# Altium PCB Carte_GR_2017_propulsion_v1.PcbDoc
Units mil, origin at the board's own origin, x right, y up, seen from the top; angles counter-clockwise.
Board outline 2400 x 3900 mil, 4 copper layers (Component Side, Inner Layer 1, Inner Layer 2, Solder Side), stack 33.234 mil thick; 74 components, 63 nets, 304 pads, 69 vias.
Unrouted connection lines stored in the file: 8.
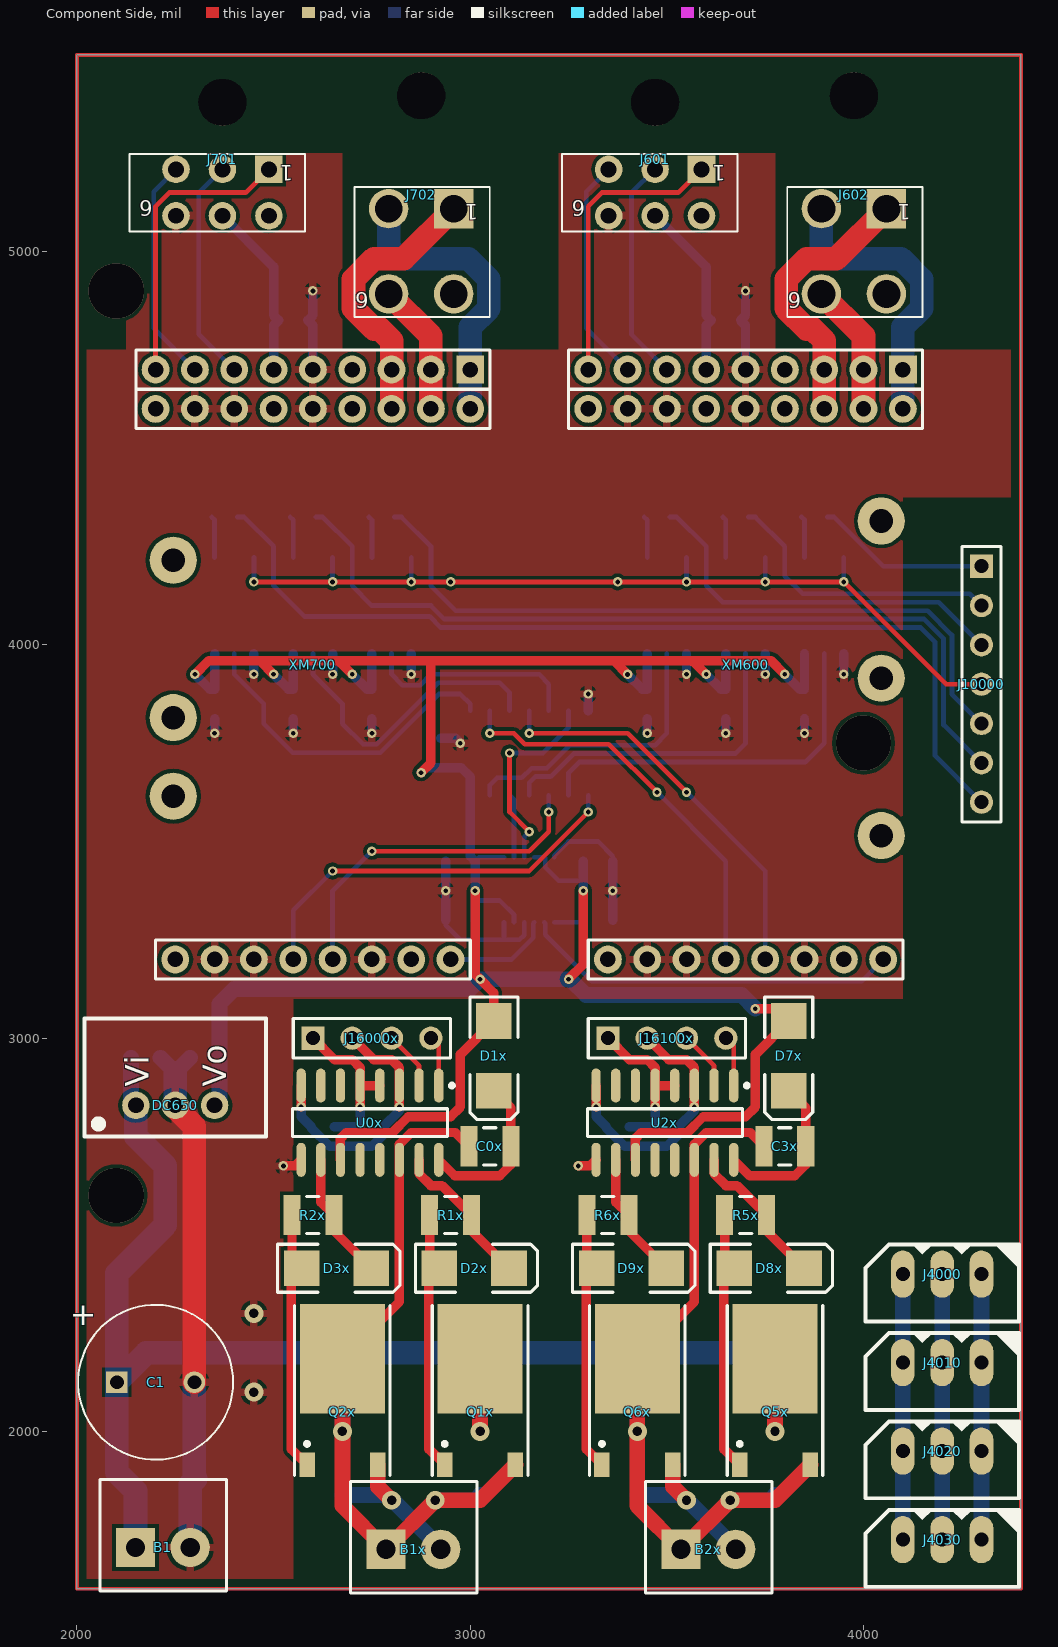
[diagram p0: Component Side view]
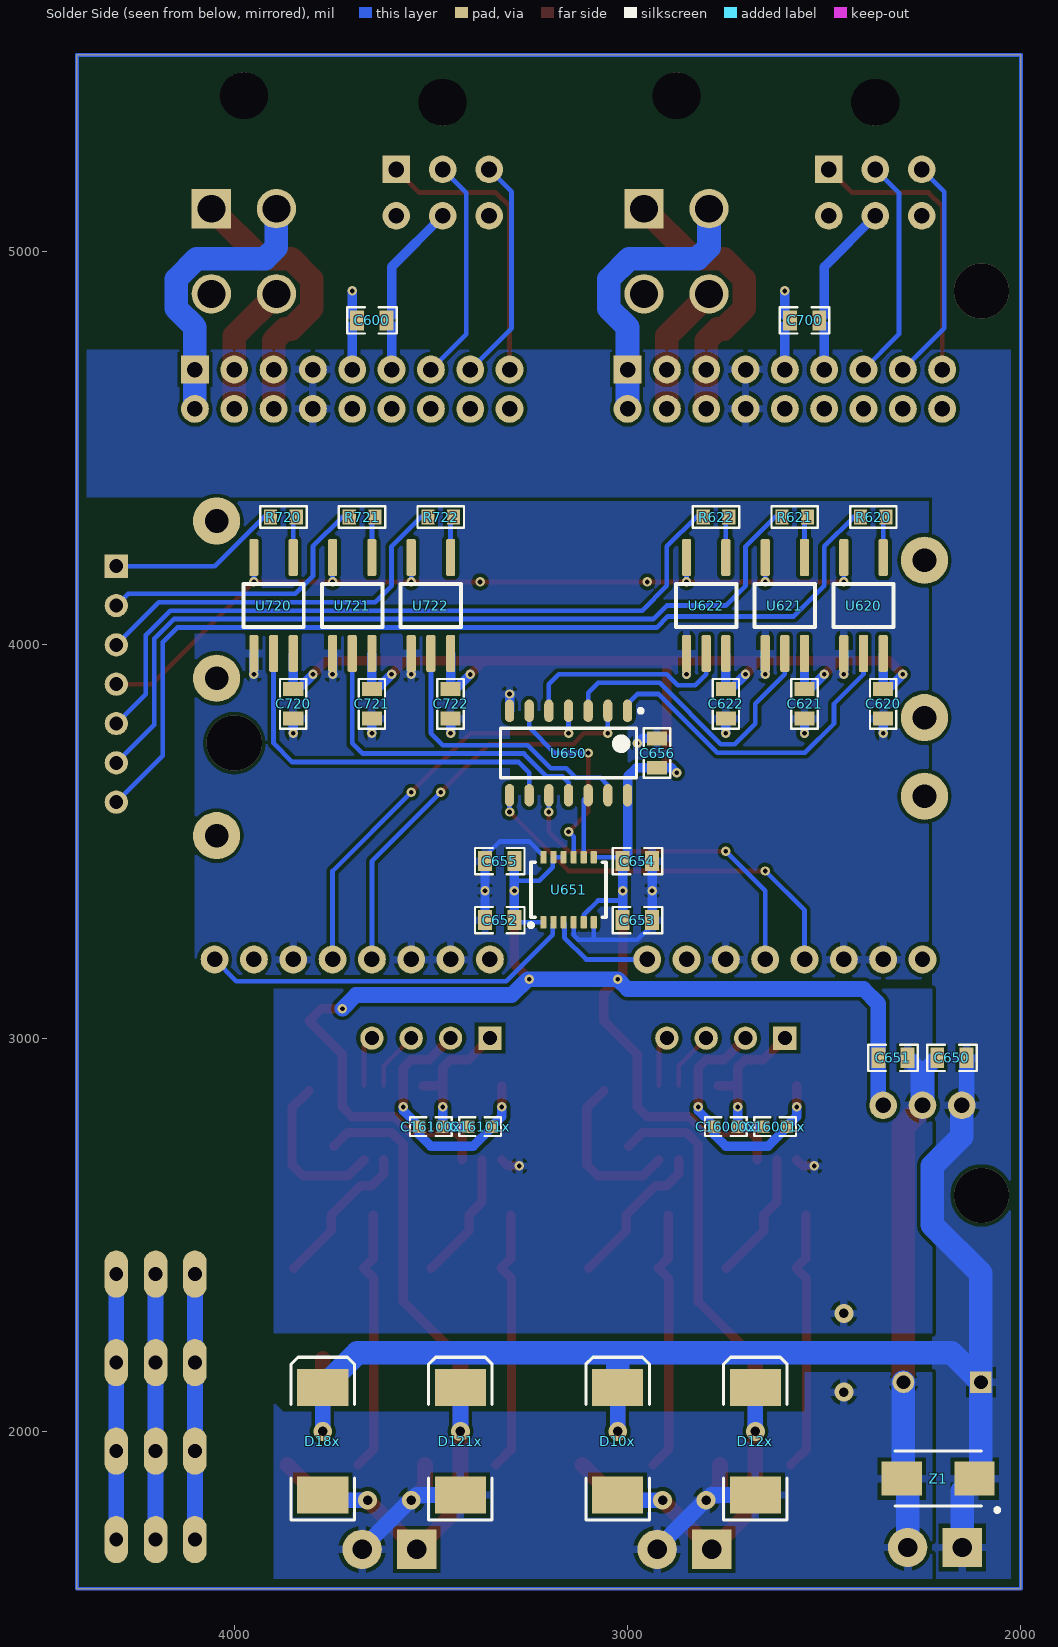
[diagram p1: Solder Side view, seen from below]
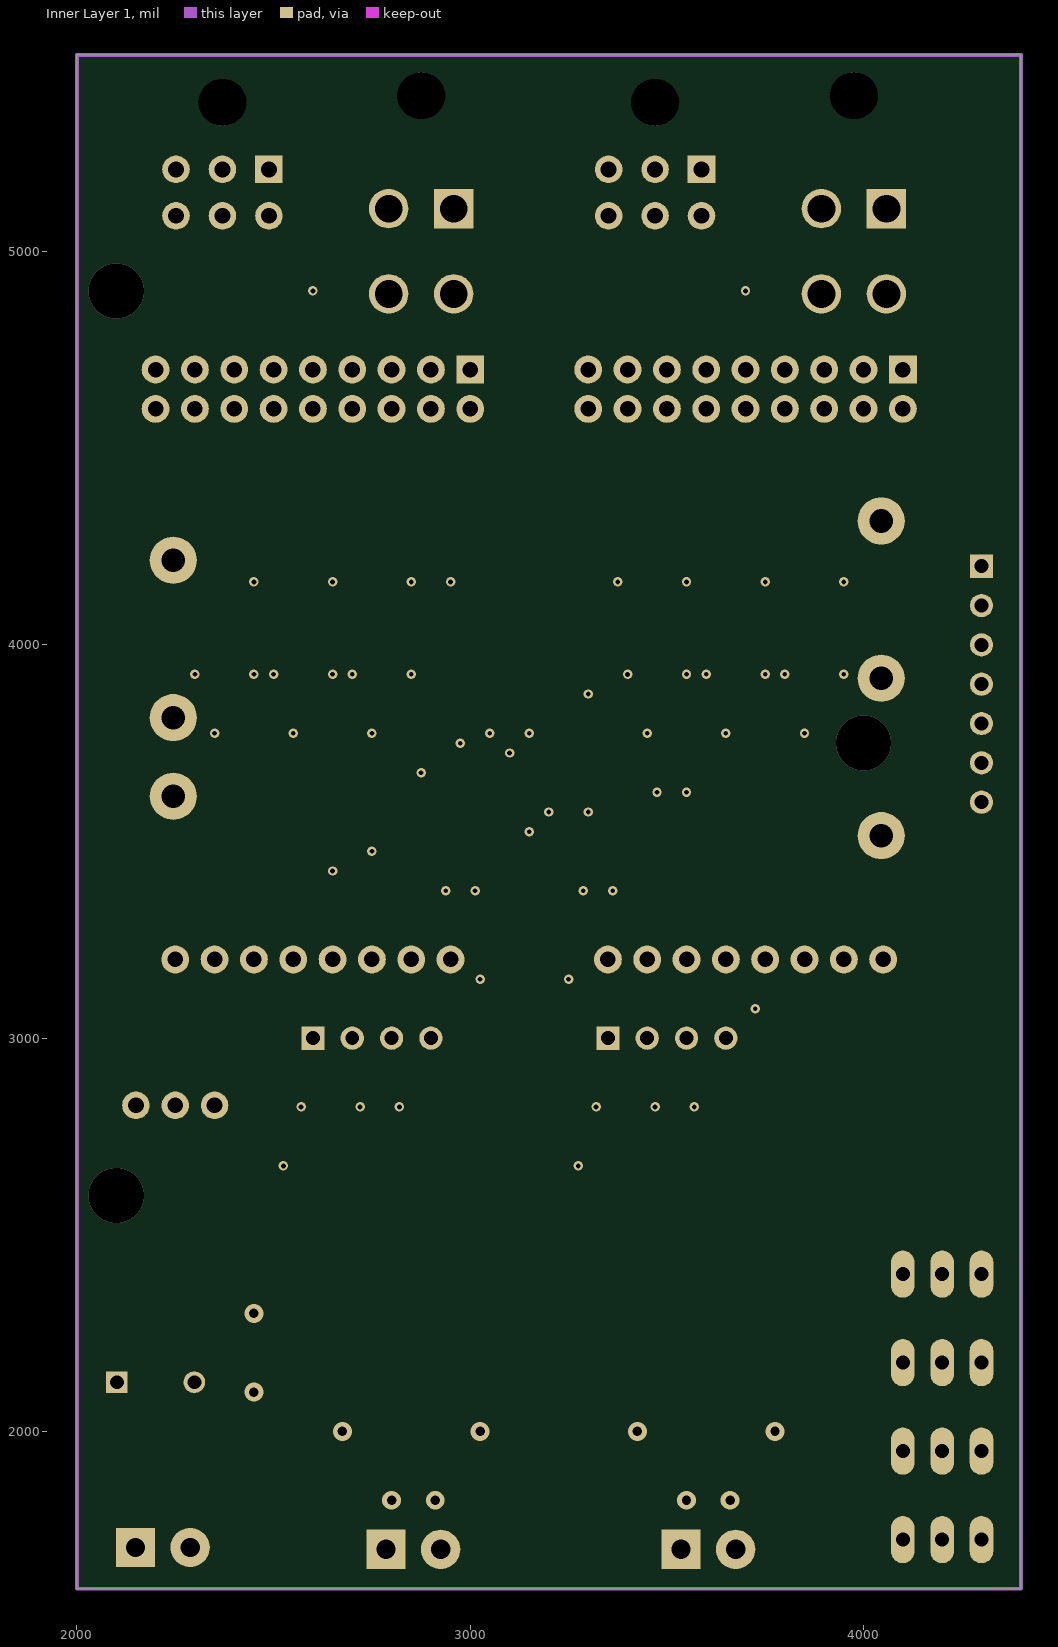
[diagram p2: Inner Layer 1]
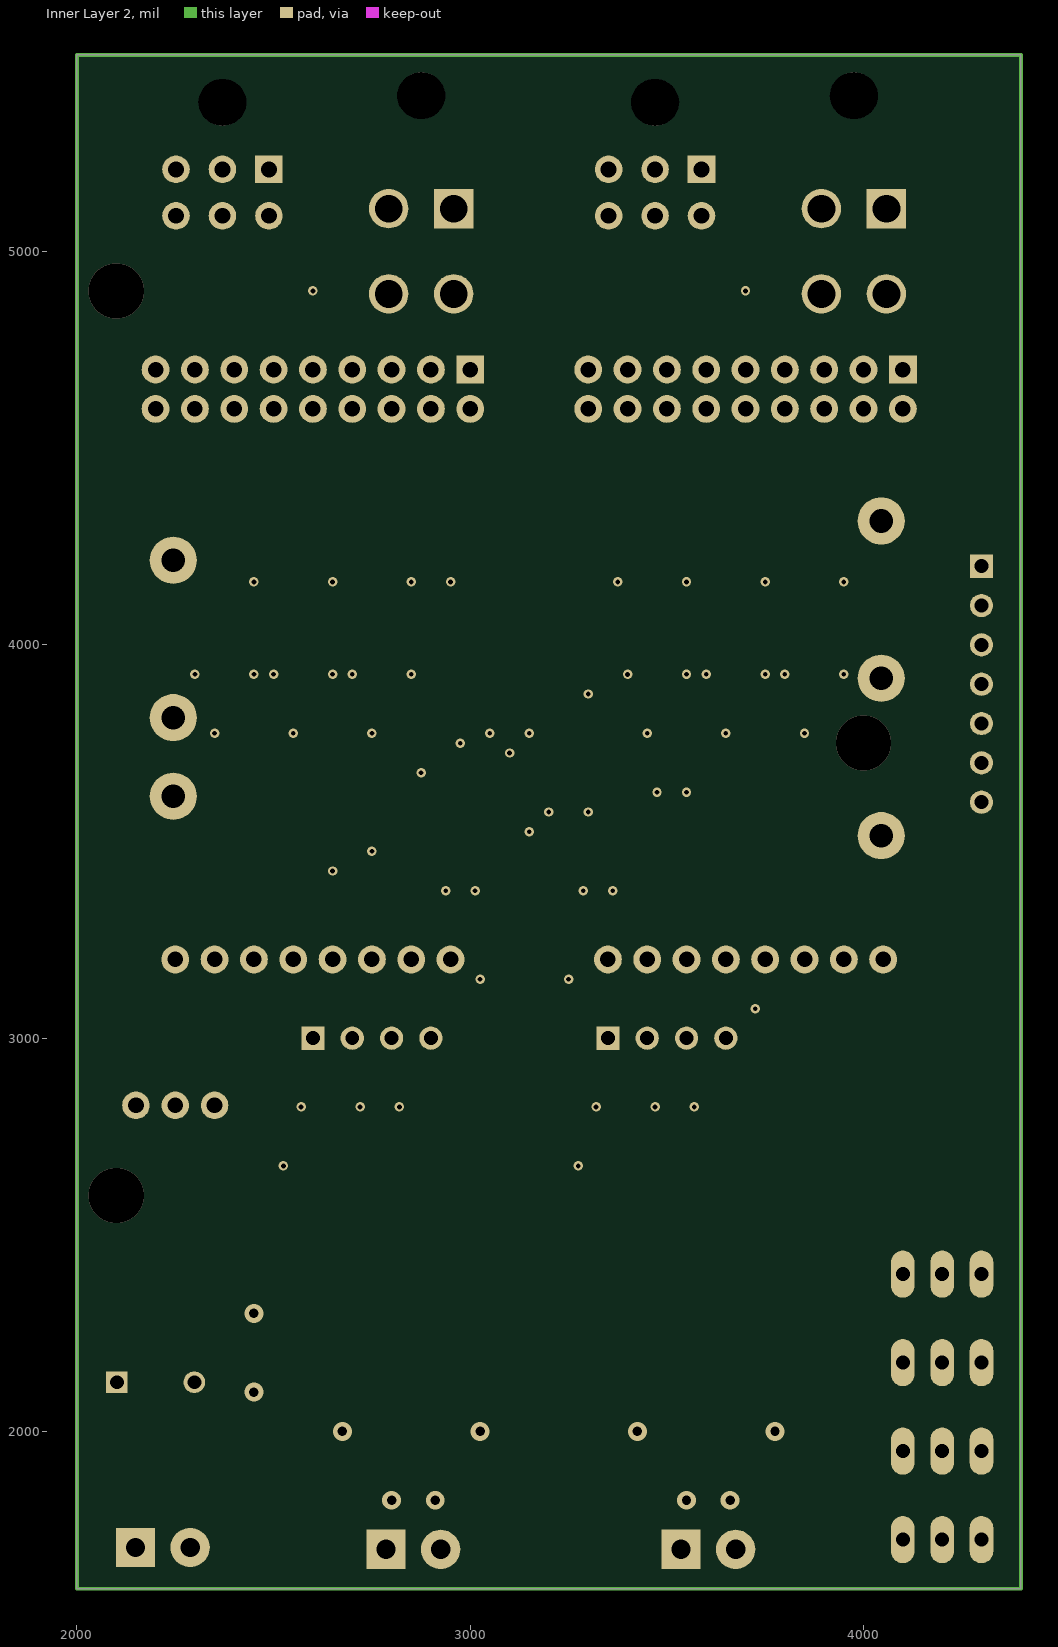
[diagram p3: Inner Layer 2]
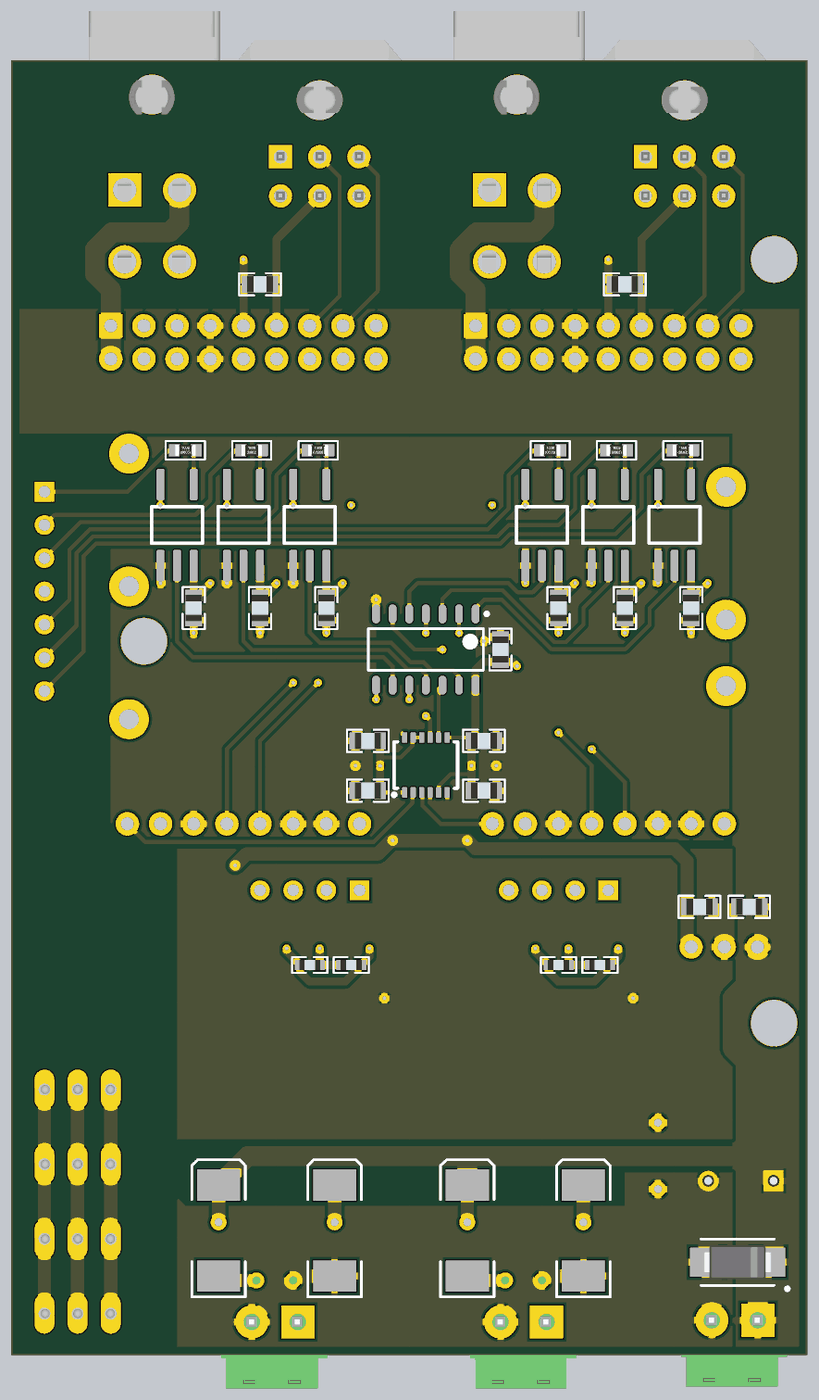
[diagram p4: 3D render of the assembled board from below, using the file's embedded part models]

## Layer stack, top to bottom
Top Solder: solder mask 0.4, Solder Resist, Dk 3.5
Component Side: signal copper 1.4
Dielectric 1: core 12.6, FR-4, Dk 4.8
Inner Layer 1: signal copper 1.417
Dielectric 6: prepreg 5, Dk 4.2
Inner Layer 2: signal copper 1.417
Dielectric 5: core 10, Dk 4.2
Solder Side: signal copper 1.4
Bottom Solder: solder mask 0.4, Solder Resist, Dk 3.5

## Board outline
2000,1600 4400,1600 4400,5500 2000,5500

## Design rules (kind name [scope] priority, off if disabled: settings)
Clearance [All] p1: gap=9.5
ComponentClearance [All] p1 off: gap=0 collisioncheckmode=3 verticalgap=10 showdistances=FALSE
PolygonConnect [All] p1: connectstyle=Relief reliefconductorwidth=20 reliefentries=4 polygonreliefangle="90 Angle" airgapwidth=10
RoutingVias [All] p1: holewidth=12 width=24 viastyle="Through Hole" minholewidth=2 minwidth=5 maxholewidth=500 maxwidth=500
SolderMaskExpansion [All] p1: expansion=4
Width [All] p1: maxlimit=400 minlimit=10 preferedwidth=20 minimp=50.000000 maximp=50.000000 favimp=50.000000
29 further rules are at their usual default settings.

## Components (designator, comment, footprint, x,y, rotation, side; value= is the part's Value field where it differs from the comment)
B1 "1776275-2" BORNIER_2V_3.5MM 2150,1705 r0 top
B1x "1776275-2" BORNIER_2V_3.5MM 2787,1700 r0 top
B2x "1776275-2" BORNIER_2V_3.5MM 3537,1700 r0 top
C0x "Cap Semi" C1210 3050,2725 r180 top
C1 "330 uF" WCAP-ATG8_10x12.5x5x0.6 2200,2125 r180 top
C3x "Cap Semi" C1210 3800,2725 r180 top
C600 "1uF" "WCAP-CSGP_0805, 2x1.25x1.25" 3650,4825 r180 bottom
C620 "1uF" "WCAP-CSGP_0805, 2x1.25x1.25" 2350,3850 r90 bottom
C621 "1uF" "WCAP-CSGP_0805, 2x1.25x1.25" 2550,3850 r90 bottom
C622 "1uF" "WCAP-CSGP_0805, 2x1.25x1.25" 2750,3850 r90 bottom
C650 "1uF" "WCAP-CSGP_0805, 2x1.25x1.25" 2175,2950 r180 bottom
C651 "1uF" "WCAP-CSGP_0805, 2x1.25x1.25" 2325,2950 r0 bottom
C652 "1uF" "WCAP-CSGP_0805, 2x1.25x1.25" 3325,3300 r180 bottom
C653 "1uF" "WCAP-CSGP_0805, 2x1.25x1.25" 2975,3300 r0 bottom
C654 "1uF" "WCAP-CSGP_0805, 2x1.25x1.25" 2975,3450 r0 bottom
C655 "1uF" "WCAP-CSGP_0805, 2x1.25x1.25" 3325,3450 r180 bottom
C656 "1uF" "WCAP-CSGP_0805, 2x1.25x1.25" 2925,3725 r270 bottom
C700 "1uF" "WCAP-CSGP_0805, 2x1.25x1.25" 2550,4825 r180 bottom
C720 "1uF" "WCAP-CSGP_0805, 2x1.25x1.25" 3850,3850 r90 bottom
C721 "1uF" "WCAP-CSGP_0805, 2x1.25x1.25" 3650,3850 r90 bottom
C722 "1uF" "WCAP-CSGP_0805, 2x1.25x1.25" 3450,3850 r90 bottom
C16000x "1µF" "WCAP-CSGP_0603, 1.6x0.8x0.8" 2750,2775 r180 bottom
C16001x "1µF" "WCAP-CSGP_0603, 1.6x0.8x0.8" 2625,2775 r0 bottom
C16100x "1µF" "WCAP-CSGP_0603, 1.6x0.8x0.8" 3500,2775 r0 bottom
C16101x "1µF" "WCAP-CSGP_0603, 1.6x0.8x0.8" 3375,2775 r0 bottom
D1x "D Schottky" SMB 3060,2955 r270 top
D2x "D Schottky" SMB 3010,2415 r0 top
D3x "D Schottky" SMB 2660,2415 r0 top
D7x "D Schottky" SMB 3810,2955 r270 top
D8x "D Schottky" SMB 3760,2415 r0 top
D9x "D Schottky" SMB 3410,2415 r0 top
D10x "Diode" SMC 3025,1975 r90 bottom
D12x "Diode" SMC 2675,1975 r90 bottom
D18x "Diode" SMC 3775,1975 r90 bottom
D121x "Diode" SMC 3425,1975 r90 bottom
DC650 "Traco 5V 1A" TSR1 2250,2900 r180 top
J601 "43045-0600" 43045-0600 3470,5150 r180 top
J602 "39-30-0040" 39-30-0040 3940,5050 r180 top
J701 "43045-0600" 43045-0600 2370,5150 r180 top
J702 "39-30-0040" 39-30-0040 2840,5050 r180 top
J4000 "22-03-5035" 20-03-5035 4200,2375 r0 top
J4010 "22-03-5035" 20-03-5035 4200,2150 r0 top
J4020 "22-03-5035" 20-03-5035 4200,1925 r0 top
J4030 "22-03-5035" 20-03-5035 4200,1700 r0 top
J10000 "" HDR1X7 4300,4200 r270 top
J16000x "MC34645" HDR1X4 2600,3000 r0 top
J16100x "MC34645" HDR1X4 3350,3000 r0 top
Q1x "IRLR8503" TO-252AA 3025,2050 r0 top
Q2x "IRLR8503" TO-252AA 2675,2050 r0 top
Q5x "IRLR8503" TO-252AA 3775,2050 r0 top
Q6x "IRLR8503" TO-252AA 3425,2050 r0 top
R1x "Res3" 14-1210 2950,2550 r180 top
R2x "Res3" 14-1210 2600,2550 r180 top
R5x "Res3" 14-1210 3700,2550 r180 top
R6x "Res3" 14-1210 3350,2550 r180 top
R620 "RC0603FR-0710KL" RESC1608X06N 2375,4325 r180 bottom
R621 "RC0603FR-0710KL" RESC1608X06N 2575,4325 r180 bottom
R622 "RC0603FR-0710KL" RESC1608X06N 2775,4325 r180 bottom
R720 "RC0603FR-0710KL" RESC1608X06N 3875,4325 r180 bottom
R721 "RC0603FR-0710KL" RESC1608X06N 3675,4325 r180 bottom
R722 "RC0603FR-0710KL" RESC1608X06N 3475,4325 r180 bottom
U0x "ADUM3223ARZ" SOIC16_N 2745,2785 r270 top
U2x "ADUM3223ARZ" SOIC16_N 3495,2785 r270 top
U620 "ACPL-M72T" ACPL-M72T 2400,4100 r270 bottom
U621 "ACPL-M72T" ACPL-M72T 2600,4100 r270 bottom
U622 "ACPL-M72T" ACPL-M72T 2800,4100 r270 bottom
U650 "CD74HC14M" SOIC127P600X175-14N 3150,3725 r270 bottom
U651 "LTC2644" MSOP-12_LTC2644 3150,3375 r90 bottom
U720 "ACPL-M72T" ACPL-M72T 3900,4100 r270 bottom
U721 "ACPL-M72T" ACPL-M72T 3700,4100 r270 bottom
U722 "ACPL-M72T" ACPL-M72T 3500,4100 r270 bottom
XM600 "380200" 380200_goldo 3300,3200 r0 top
XM700 "380200" 380200_goldo 2200,3200 r0 top
Z1 "SMBJ54A" "SMA Diode (DO-214AA)" 2210,1880 r0 bottom

## Footprints (in the part's own frame and the unit in brackets; to place one, negate y for a bottom-side part, rotate by r counter-clockwise, add the part's x,y. Pads: shape width x height; smd on the part's side, far side on the other; paste and mask are expansions set on the pad)
14-1210 [mm] "Chip Resistor, Body 3.2x2.5mm, IPC High Density"
  rect 1.1x2.6 smd: 1(-1.35,0) 2(1.35,0)
  silkscreen extent -0.4,-1.2 0.4,1.2, body extent -1.68,-1.32 1.68,1.32, height 0.9
20-03-5035 [mil]
  oval 60x120 hole 35.43: 1(100,25) 2(0,25) 3(-100,25)
  silkscreen extent -195,-95 195,100, body extent -195,-96 194,97, height 234
39-30-0040 [mm] "4 pins, straight"
  round 3 hole 3 slot 3.1 at 0 deg: 0(-0.9,-8.8)
  rect 2.54x2.54 hole 1.8: 1(-3,-1.5)
  round 2.54 hole 1.8: 2(-3,4) 3(1.2,-1.5) 4(1.2,4)
  silkscreen extent -5.33,-2.9 3.4,5.5, body extent -5.72,-15.19 4.28,4.74, height 11.4
43045-0600 [mm] "6 pins, straight"
  round 3 hole 3 slot 3.1 at 0 deg: 0(0,-5.825)
  rect 1.778x1.778 hole 1.02: 1(-3,-1.5)
  round 1.778 hole 1.02: 2(-3,1.5) 3(0,-1.5) 4(0,1.5) 5(3,-1.5) 6(3,1.5)
  silkscreen extent -5.33,-2.5 6,2.5, body extent -6.57,-10.45 6.58,1.79, height 9.83
380200_goldo [mm] "MAXON"
  rect 1.8x1.8 hole 1: 1(20.32,38.1)
  round 1.8 hole 1: 2(20.32,35.56) 3(17.78,38.1) 4(17.78,35.56) 5(15.24,38.1) 6(15.24,35.56) 7(12.7,38.1) 8(12.7,35.56) 9(10.16,38.1) 10(10.16,35.56) 11(7.62,38.1) 12(7.62,35.56) 13(5.08,38.1) 14(5.08,35.56) 15(2.54,38.1) 16(2.54,35.56) 17(0,38.1) 18(0,35.56) 19(1.27,0) 20(3.81,0) 21(6.35,0) 22(8.89,0) 23(11.43,0) 24(13.97,0) 25(16.51,0) 26(19.05,0)
  silkscreen extent -1.27,-1.27 21.59,39.37, body extent -1.27,-1.27 21.59,39.37
ACPL-M72T [mm]
  rrect40% 2.4x0.6 smd: 1(-3.1,1.27) 3(-3.1,-1.27) 4(3.1,-1.27) 5(3.1,0) 6(3.1,1.27)
  silkscreen extent -1.4,-1.95 1.4,1.95, body extent -2.3,-1.95 2.3,1.95, height 2.4
BORNIER_2V_3.5MM [mm]
  rect 2.54x2.54 hole 1.25: 1(-0.025,0)
  round 2.54 hole 1.25: 2(3.5,0)
  silkscreen extent -2.31,-2.82 5.84,4.39, body extent -2.27,-5.08 5.83,5.32, height 21.81
C1210 [mm] "Chip Capacitor, Body 3.2x2.5mm, IPC High Density"
  rect 1.1x2.6 smd: 1(-1.35,0) 2(1.35,0)
  silkscreen extent -0.4,-1.2 0.4,1.2, body extent -1.7,-1.35 1.7,1.35, height 1.3
HDR1X4 [mm]
  rect 1.5x1.5 hole 0.9: 1(0,0)
  round 1.5 hole 0.9: 2(2.54,0) 3(5.08,0) 4(7.62,0)
  silkscreen extent -1.27,-1.27 8.89,1.27
HDR1X7 [mm]
  rect 1.5x1.5 hole 0.9: 1(0,0)
  round 1.5 hole 0.9: 2(2.54,0) 3(5.08,0) 4(7.62,0) 5(10.16,0) 6(12.7,0) 7(15.24,0)
  silkscreen extent -1.27,-1.27 16.51,1.27
MSOP-12_LTC2644 [mm]
  rrect30% 0.8x0.4 smd: 1(-2.041,1.622) 2(-2.041,0.972) 3(-2.041,0.322) 4(-2.041,-0.328) 5(-2.041,-0.978) 6(-2.041,-1.628) 7(2.159,-1.628) 8(2.159,-0.978) 9(2.159,-0.328) 10(2.159,0.322) 11(2.159,0.972)
  rrect20% 0.8x0.4 smd: 12(2.159,1.622)
  silkscreen extent -2.35,-2.43 1.84,2.55, body extent -1.5,-2 1.5,2, height 1.1
RESC1608X06N [mm] "Chip Resistor, 2-Leads, Body 1,6x0,8mm, IPC Medium Density"
  rect 0.85x0.95 smd: 1(-0.825,0) 2(0.825,0)
  silkscreen extent -1.5,-0.7 1.5,0.7, body extent -0.77,-0.43 0.77,0.43, height 0.8
"SMA Diode (DO-214AA)" [mm] "Case DO-214AA"
  rect 2.6x2.2 smd: 1(2.35,0) 2(-2.35,0)
  silkscreen extent -3.93,-1.78 2.79,2.16, body extent -2.8,-1.46 2.79,1.46, height 2.41
SMB [mm] "DO-214-AA/SMB; 2 C-Bend Leads; Body 5.3 x 3.6 mm, inc. leads (LxW)"
  rect 2.3x2.3 smd: 1(-2.25,0) 2(2.25,0)
  silkscreen extent -3.8,-1.55 4.1,1.55
SMC [mm] "DO-214-AB/SMC; 2 C-Bend Leads; Body 7.9 x 5.9 mm, inc. leads (LxW)"
  rect 2.4x3.3 smd: 1(-3.475,0) 2(3.475,0)
  silkscreen extent -5.07,-2.05 5.43,2.05
SOIC16_N [mm] "SOIC, 16-Leads, Body 9.9x3.9mm, Pitch 1.27mm, IPC Medium Density"
  oval 2.2x0.6 smd: 1(-2.4,4.445) 2(-2.4,3.175) 3(-2.4,1.905) 4(-2.4,0.635) 5(-2.4,-0.635) 6(-2.4,-1.905) 7(-2.4,-3.175) 8(-2.4,-4.445) 9(2.4,-4.445) 10(2.4,-3.175) 11(2.4,-1.905) 12(2.4,-0.635) 13(2.4,0.635) 14(2.4,1.905) 15(2.4,3.175) 16(2.4,4.445)
  silkscreen extent -2.52,-5 0.9,5.42, body extent -2,-5 2,5, height 1.91
SOIC127P600X175-14N [mm] "SOIC, 14-Leads, Body 8,65x3,90mm, Pitch 1,27mm, IPC Medium Density"
  oval 1.45x0.6 smd: 1(-2.725,3.81) 2(-2.725,2.54) 3(-2.725,1.27) 4(-2.725,0) 5(-2.725,-1.27) 6(-2.725,-2.54) 7(-2.725,-3.81) 8(2.725,-3.81) 9(2.725,-2.54) 10(2.725,-1.27) 11(2.725,0) 12(2.725,1.27) 13(2.725,2.54) 14(2.725,3.81)
  silkscreen extent -2.85,-4.4 1.6,4.78, body extent -2,-4.4 2,4.4, height 1.75
TO-252AA [mm] "D-PAK/TO-252-AA; 3 Leads (1 Cropped); Body 10.4 (inc. leads) x 6.7 mm (LxW max)"
  rect 1x1.6 smd: 1(-2.285,-3.425) 3(2.285,-3.425)
  rect 5.5x7.1 smd: 4(0,3.425)
  silkscreen extent -3.08,-4.13 3.08,6.88
TSR1 [mil]
  round 70 hole 40: 1(100,70.87) 2(0,70.87) 3(-100,70.87)
  silkscreen extent -230,-150 230,150, body extent -230,-150 230,150, height 402
WCAP-ATG8_10x12.5x5x0.6 [mm] "Polarized capacitors, Aluminum Electrolytic Capacitors, 2-Leads, Body 10x12.5x5x0.6"
  rect 1.4x1.4 hole 0.9: 1(2.5,0)
  round 1.4 hole 0.9: 2(-2.5,0)
  silkscreen extent -5,-5 5,5, body extent -4.99,-5 4.96,4.97, height 12.61
"WCAP-CSGP_0603, 1.6x0.8x0.8" [mm] "WCAP-CSGP Ceramic Capacitors, size 0603, body 1.6x0.8x0.8"
  rect 0.8x0.8 smd: 1(-0.75,0) 2(0.75,0)
  silkscreen extent -1.35,-0.6 1.35,0.6, body extent -0.8,-0.4 0.8,0.4, height 0.8
"WCAP-CSGP_0805, 2x1.25x1.25" [mm] "WCAP-CSGP Ceramic Capacitors, size 0805, body 2x1.25x1.25"
  rect 0.9x1.3 smd: 1(-0.95,0) 2(0.95,0)
  silkscreen extent -1.6,-0.85 1.6,0.85, body extent -1,-0.62 1,0.63, height 1.22

## Part data
B1 B1x B2x: "TERM BLOCK 2POS SIDE ENT 3.5MM"
C0x C3x: "Capacitor (Semiconductor SIM Model)"
C1: library part "WCAP-ATG8, 860010575012", "CAP Alu 330 UF 20% 35 V"
C600 C620 C621 C622 C650 C651 C652 C653 C654 C655 C656 C700 C720 C721 C722: library part "WCAP-CSGP, 885012207103", "CAP CER 1uF 50V X7R 0805"
C16000x C16001x C16100x C16101x: library part "WCAP-CSGP, 885012206095", "CAP CER 100nF 50V X7R 0603"
D1x D2x D3x D7x D8x D9x: "Schottky Diode"
D10x D12x D18x D121x: "Default Diode"
DC650: library part TSR1-24120, "Traco 12.0V 12W 1A"
J601 J701: "CONN HEADER 6POS 3MM RT ANG TIN"
J602 J702: "MOLEX  39-30-0040 4.2 mm, 4 Contact(s)"
J4000 J4010 J4020 J4030: library part 20-03-5035
J10000: library part HDR1X7, "CONN HEADER 7POS 100MILS"
J16000x J16100x: "MULTICOMP - MC34645 - EMB. MALE COUDEE  CON. MALE 2.54MM 4VOIE"
Q1x Q2x Q5x Q6x: "HEXFET Power MOSFET"
R1x R2x R5x R6x: "Resistor"
R620 R621 R622 R720 R721 R722: "RES SMD 10K OHM 1% 1/10W 0603"
U620 U621 U622 U720 U721 U722: "Optocoupleur"
U650: "IC HEX INV SCHMITT TRIG 14-SOIC"
XM600 XM700: "DEC Module 50/5, amplificateur EC 1 Q 50 V / 5 A, régulation de vitesse, module OEM"
Z1: "DIODE TVS (Transil unidirectionelle)"

## Free pads (board coordinates)
  round 120 hole 60: 3(4045,4315) 4(4045,3915) 5(4045,3515) 6(2245,3615) 7(2245,3815) 8(2245,4215)

## Via types
v1: diameter 24, hole 12, Component Side to Solder Side, 56 vias
v2: diameter 48, hole 24, Component Side to Solder Side, 10 vias
v3: diameter 140, hole 140, Component Side to Solder Side, 3 vias

## Nets (pads, with @x,y where several pads share a name; then routed paths per layer and width w, separated by ;. In a path a pad name is that pad's centre, name@x,y a point inside that pad or via, vN(x,y) a via of type N, cw(c..) or ccw(c..) an arc to the next point about the centre after c; other vN are vias at no path point)
5V_OPTO: C620.2 C621.2 C622.2 C651.2 C652.2 C653.2 C654.2 C655.2 C656.2 C720.2 C721.2 C722.2 D1x.1 D7x.1 DC650.3 U0x.11 U2x.11 U620.6 U621.6 U622.6 U650.14 U651.1 U651.5 U651.7 U651.10 U651.11 U720.6 U721.6 U722.6 | length 7730.6
  Component Side w24: v1(2300,3925) 2335,3960 2465,3960 ; v1(2500,3925) 2465,3960 ; U0x.11 2670,2745 2685,2760 2802.62,2760 2842.62,2800 2950,2800 2975,2825 2975,2958.58 D1x.1 3060,3115 v1(3025,3150) 3012.4,3162.6 v1(3012.4,3375) ; 2670,3955 v1(2700,3925) ; v1(2875,3675) 2900,3700 2900,3960 ; v1(3250,3150) 3287.6,3187.6 v1(3287.6,3375) ; v1(3400,3924.8) 3364.8,3960 ; U2x.11 3420,2745 3435,2760 3552.62,2760 3592.62,2800 3700,2800 3725,2825 3725,2958.58 D7x.1 3778.58,3075 v1(3725,3075) ; 3561.5,3958.5 3566.5,3958.5 v1(3600,3925) ; v1(3799.8,3925) 3764.8,3960 3364.8,3960 ; 2465,3960 2900,3960 ; 2900,3960 3364.8,3960
  Solder Side w12: 3012.4,3350 3075,3350 3111.5,3313.5 U651.5 ; C654.2 3022.4,3460 U651.7 ; U651.10 U651.11 3190.48,3457.78 3190.48,3434.52 3225,3400 3287.6,3400 ; U651.1 3282.24,3294.65 C652.2
  Solder Side w24: v1(2300,3925) 2337.6,3887.4 C620.2 U620.6 ; v1(2500,3925) 2537.6,3887.4 C621.2 U621.6 ; v1(2700,3925) 2737.6,3887.4 C622.2 U622.6 ; v1(2875,3675) 2887.6,3687.6 C656.2 2977.4,3687.6 3000,3665 U650.14 3000,3462.4 C654.2 v1(3012.4,3375) 3012.4,3350 C653.2 ; C652.2 v1(3287.6,3375) 3287.6,3400 C655.2 ; v1(3400,3924.8) 3437.4,3887.4 C722.2 U722.6 ; v1(3600,3925) 3600,3924.8 3637.4,3887.4 C721.2 U721.6 ; v1(3799.8,3925) 3837.4,3887.4 C720.2 U720.6
  Solder Side w40: DC650.3 2362.4,2841.54 C651.2 2362.4,3087.4 2400,3125 3000,3125 v1(3025,3150) v1(3250,3150) 3253.68,3150 3294.18,3109.5 3690.5,3109.5 v1(3725,3075)
5V_SERVO: C16000x.1 C16001x.1 C16100x.2 C16101x.1 J16000x.2 J16100x.2 U0x.3 U0x.8 U2x.3 U2x.8 | length 1344
  Component Side w24: v1(2570,2825) U0x.8 ; J16000x.2 2755,2945 2800,2945 2820,2925 U0x.3 v1(2820,2825) ; v1(3320,2825) U2x.8 ; J16100x.2 3505,2945 3550,2945 3570,2925 U2x.3 v1(3570,2825)
  Solder Side w24: v1(2570,2825) 2570,2800.47 C16001x.1 2595.47,2772.15 2642.63,2725 2750,2725 2779.53,2754.53 C16000x.1 2820,2815.47 v1(2820,2825) ; v1(3320,2825) 3320,2800.47 C16101x.1 3345.47,2772.15 3392.63,2725 3500,2725 3529.53,2754.53 C16100x.2 3570,2815.47 v1(3570,2825)
24V: B1.1 C1.1 C650.2 D10x.2 D18x.2 DC650.1 Q1x.4 Q5x.4 XM600.7 XM600.8 XM700.7 XM700.8 Z1.2 | length 3776.6
  Component Side w40: v2(3025,2000) Q1x.4 ; v2(3775,2000) Q5x.4
  Solder Side w40: C650.2 2137.6,2841.54 DC650.1 ; 3020,2200 3025,2195 ; v2(3025,2000) D10x.2 ; v2(3775,2000) D18x.2
  Solder Side w60: B1.1 2149,1848.48 Z1.2 2101.57,1895.91 C1.1 ; DC650.1 2150,2750 2225,2675 2225,2525 2101.57,2401.57 C1.1 ; D10x.2 3025,2195 ; D18x.2 3686.81,2200 3020,2200 2176.57,2200 C1.1
DYNA_D0: J4000.1 J4010.1 J4020.1 J4030.1 | length 675
  Solder Side w40: J4030.1 J4020.1 J4010.1 J4000.1
GND: C16000x.2 C16001x.2 C16100x.1 C16101x.2 J4000.3 J4010.3 J4020.3 J4030.3 J10000.4 J16000x.1 J16100x.1 U0x.4 U0x.5 U2x.4 U2x.5 U620.3 U621.3 U622.3 U720.3 U721.3 U722.3 | length 54239.4
  Component Side w10: 2000,1600 2000,5500 4400,5500 4400,1600 2000,1600
  Component Side w12: v1(2450,4160) v1(2650,4160) v1(2850,4160) v1(2950,4160) v1(3375,4160) v1(3550,4160) v1(3750,4160) v1(3950,4160) 4210,3900 J10000.4
  Component Side w24: J16000x.1 2655,2945 2700,2945 2720,2925 U0x.5 ; v1(2720,2825) U0x.5 ; U0x.4 U0x.5 ; J16100x.1 3405,2945 3450,2945 3470,2925 U2x.5 ; v1(3470,2825) U2x.5 ; U2x.4 U2x.5
  Inner Layer 1 w10: 2000,1600 4400,1600 4400,5500 2000,5500 2000,1600
  Inner Layer 2 w10: 2000,1600 4400,1600 4400,5500 2000,5500 2000,1600
  Solder Side w10: 2000,1600 4400,1600 4400,5500 2000,5500 2000,1600
  Solder Side w12: v1(2450,4160) U620.3 ; v1(2650,4160) U621.3 ; v1(2850,4160) U622.3 ; v1(3550,4160) U722.3 ; v1(3750,4160) U721.3 ; v1(3950,4160) U720.3
  Solder Side w24: C16001x.2 C16000x.2 2720,2775.47 v1(2720,2825) ; C16101x.2 C16100x.1 3470,2775.47 v1(3470,2825)
  Solder Side w40: J4030.3 J4020.3 J4010.3 J4000.3
GND_PWR: B1.2 B1x.2 B2x.2 C1.2 C600.1 C620.1 C621.1 C622.1 C650.1 C651.1 C652.1 C653.1 C654.1 C655.1 C656.1 C700.1 C720.1 C721.1 C722.1 D12x.1 D121x.1 DC650.2 J601.6 J701.6 Q2x.3 Q6x.3 U0x.9 U2x.9 U620.4 U621.4 U622.4 U650.7 U651.4 U651.6 U651.12 U720.4 U721.4 U722.4 XM600.9 XM600.10 XM600.14 XM600.16 XM600.20 XM600.21 XM600.24 XM700.9 XM700.10 XM700.14 XM700.16 XM700.20 XM700.21 XM700.24 Z1.1 | length 4139.4
  Component Side w24: v1(2525,2675) 2554.49,2675 U0x.9 ; v1(3275,2675) 3304.49,2675 U2x.9
  Component Side w40: Q2x.3 2764.96,1860.04 v2(2800,1825) ; B1x.2 B1x.2@2924.8,1700.2 ; Q6x.3 3514.96,1860.04 v2(3550,1825) ; B2x.2 B2x.2@3674.8,1700.2
  Component Side w60: DC650.2 2250,2823.78 2298.43,2775.35 C1.2
  Solder Side w12: C653.1 2937.6,3287.4 2975,3250 3085,3250 ; U651.6 3085.91,3250.91 3085,3250 ; U651.4 3137.09,3262.09 3125,3250 3085,3250 ; U651.12 3213.86,3463.86 3250,3500 3325,3500 3362.4,3462.6 C655.1
  Solder Side w24: v1(2350,3775) C620.1 ; v1(2450,3925) U620.4 ; v1(2550,3775) C621.1 ; XM700.9 2600,4812.4 C700.1 2600,4837.6 v1(2600,4900) ; v1(2650,3925) U621.4 ; v1(2750,3775) C622.1 ; v1(2850,3925) U622.4 ; C656.1 2962.6,3762.4 v1(2975,3750) ; C653.1 C654.1 ; U650.7 v1(3300,3875) ; C652.1 C655.1 ; v1(3450,3775) C722.1 ; v1(3550,3925) U722.4 ; v1(3650,3775) C721.1 ; XM600.9 3700,4812.4 C600.1 3700,4837.6 v1(3700,4900) ; v1(3750,3925) U721.4 ; v1(3850,3775) C720.1 ; v1(3950,3925) U720.4
  Solder Side w40: C650.1 2250,2912.4 C651.1 ; D12x.1 2786.81,1838.19 v2(2800,1825) 2802.72,1825 2924.8,1702.92 B1x.2 ; D121x.1 3536.81,1838.19 v2(3550,1825) 3552.72,1825 3674.8,1702.92 B2x.2
  Solder Side w60: DC650.2 2250,2912.4 ; B1.2 2287.8,1865.28 Z1.1 2298.43,1884.09 C1.2
  other v1: 2937.6,3375 3362.4,3375
  other v2: 2450,2100 2450,2300
L1: B2x.1 C3x.2 D18x.1 D121x.2 Q5x.3 Q6x.4 U2x.14 | length 1989.2
  Component Side w24: Q6x.4 3570,2329.84 U2x.14 3570,2730 3600,2760 3711.85,2760 C3x.2
  Component Side w40: Q6x.4 v2(3425,2000) 3425,1811 B2x.1 v2(3661,1825) 3774.8,1825 Q5x.3
  Solder Side w40: v2(3425,2000) D121x.2 ; v2(3661,1825) 3761.81,1825 D18x.1
L1_H: J16100x.4 U2x.1 | length 128.8
  Component Side w12: J16100x.4 3670,2980 U2x.1
L1_L: J16100x.3 U2x.2 | length 149.5
  Component Side w12: J16100x.3 3620,2930 U2x.2
M1_H1: J601.3 XM600.13 | length 571.2
  Solder Side w12: J601.3 3410,5149.06 3410,4790 XM600.13
M1_H2: J601.5 XM600.15 | length 576.1
  Solder Side w12: J601.5 3295,5152.17 3295,4805 XM600.15
M1_H3: J601.1 XM600.17 | length 742.1
  Component Side w12: XM600.17 3300,5115 3335,5150 3529.06,5150 J601.1
M1_VCC_H: C600.2 J601.4 XM600.11 | length 455.2
  Solder Side w24: J601.4 3600,4960.94 3600,4837.6 C600.2 3600,4812.4 XM600.11
M1_W1: J602.3 XM600.1 XM600.2 | length 736
  Solder Side w60: J602.3 3892.76,5010.95 3921.69,4982.02 4095.18,4982.02 4147.61,4929.59 4147.61,4855.45 4100,4807.84 XM600.1 XM600.2
M1_W2: J602.4 XM600.3 XM600.4 | length 336.9
  Component Side w60: J602.4 4000,4785.28 XM600.3 XM600.4
M1_W3: J602.1 XM600.5 XM600.6 | length 707.7
  Component Side w60: XM600.6 XM600.5 3900,4773.74 3870.72,4803.02 3855.68,4803.02 3803.26,4855.45 3803.26,4929.59 3855.68,4982.02 3931.07,4982.02 J602.1
M2_H1: J701.3 XM700.13 | length 571.2
  Solder Side w12: J701.3 2310,5149.06 2310,4790 XM700.13
M2_H2: J701.5 XM700.15 | length 576.1
  Solder Side w12: J701.5 2195,5152.17 2195,4805 XM700.15
M2_H3: J701.1 XM700.17 | length 742.1
  Component Side w12: XM700.17 2200,5115 2235,5150 2429.06,5150 J701.1
M2_VCC_H: C700.2 J701.4 XM700.11 | length 455.2
  Solder Side w24: J701.4 2500,4960.94 2500,4837.6 C700.2 2500,4812.4 XM700.11
M2_W1: J702.3 XM700.1 XM700.2 | length 736
  Solder Side w60: J702.3 2792.76,5010.95 2821.69,4982.02 2995.18,4982.02 3047.61,4929.59 3047.61,4855.45 3000,4807.84 XM700.1 XM700.2
M2_W2: J702.4 XM700.3 XM700.4 | length 336.9
  Component Side w60: J702.4 2900,4785.28 XM700.3 XM700.4
M2_W3: J702.1 XM700.5 XM700.6 | length 707.7
  Component Side w60: XM700.6 XM700.5 2800,4773.74 2770.72,4803.02 2755.68,4803.02 2703.26,4855.45 2703.26,4929.59 2755.68,4982.02 2831.07,4982.02 J702.1
MAXON1_DIR: U650.4 XM600.23 | length 1027.3
  Component Side w12: v1(3150,3775) 3400,3775 v1(3550,3625)
  Solder Side w12: v1(3150,3775) U650.4 ; v1(3550,3625) 3750,3425 XM600.23
MAXON1_DIR_INV: U621.5 U650.3 | length 777
  Solder Side w12: U621.5 2600,3925 2675,3850 2675,3800 2727.5,3747.5 2762.5,3747.5 2918.5,3903.5 3075,3903.5 3100,3878.5 U650.3
MAXON1_DIR_LOG: J10000.6 R621.1 | length 2138.8
  Solder Side w12: R621.1 2625.26,4325 2700,4250.26 2700,4150 2750,4100 2900,4100 2934.5,4065.5 4154.09,4065.5 4203.5,4016.09 4203.5,3796.5 J10000.6
MAXON1_EN: U650.2 XM600.22 | length 1041.9
  Component Side w12: v1(3050,3775) 3111.11,3775 3138.61,3747.5 3352.5,3747.5 v1(3475,3625)
  Solder Side w12: v1(3050,3775) U650.2 ; v1(3475,3625) 3650,3450 XM600.22
MAXON1_EN_INV: U620.5 U650.1 | length 854.5
  Solder Side w12: U620.5 2400,3925 2475,3850 2475,3800 2549,3726 2771.41,3726 2920.41,3875 2975,3875 3000,3850 U650.1
MAXON1_EN_LOG: J10000.7 R620.1 | length 2421
  Solder Side w12: R620.1 2425.26,4325 2500,4250.26 2500,4150 2577.7,4072.3 2897.3,4072.3 2925.59,4044 4145.19,4044 4182,4007.19 4182,3718 J10000.7
MAXON1_PWM: U650.6 U651.9 | length 510.3
  Component Side w12: v1(3100,3725) 3100,3575 v1(3150,3525)
  Solder Side w12: v1(3100,3725) 3185,3725 3250,3790 U650.6 ; U651.9 3137.09,3512.09 v1(3150,3525)
MAXON1_PWM_INV: U622.5 U650.5 | length 553.8
  Solder Side w12: U622.5 2800,3925 2827.5,3897.5 2872.5,3897.5 2900,3925 3175,3925 3200,3900 U650.5
MAXON1_PWM_LOG: J10000.5 R622.1 | length 1856.6
  Solder Side w12: R622.1 2825.26,4325 2900,4250.26 2900,4150 2963,4087 4163,4087 4225,4025 4225,3875 J10000.5
MAXON1_V_CMD: U651.2 XM600.26 | length 963.5
  Solder Side w12: U651.2 3190.48,3292.43 3190.48,3263.4 3308.88,3145 3995,3145 XM600.26
MAXON2_DIR: U650.10 XM700.23 | length 879.8
  Component Side w12: v1(2750,3475) 3150,3475 3200,3525 v1(3200,3575)
  Solder Side w12: XM700.23 2650,3375 v1(2750,3475) ; v1(3200,3575) U650.10
MAXON2_DIR_INV: U650.11 U721.5 | length 851.7
  Solder Side w12: U650.11 3150,3650 3165,3665 3205,3665 3263.5,3723.5 3673.5,3723.5 3700,3750 U721.5
MAXON2_DIR_LOG: J10000.2 R721.1 | length 729.8
  Solder Side w12: R721.1 3725.26,4325 3800,4250.26 3800,4175 3845,4130 4270,4130 J10000.2
MAXON2_EN: U650.8 XM700.22 | length 1021.3
  Component Side w12: v1(2650,3425) 3150,3425 v1(3300,3575)
  Solder Side w12: XM700.22 2550,3325 v1(2650,3425) ; v1(3300,3575) U650.8
MAXON2_EN_INV: U650.9 U720.5 | length 966.3
  Solder Side w12: U650.9 3250,3675 3277,3702 3852,3702 3900,3750 U720.5
MAXON2_EN_LOG: J10000.1 R720.1 | length 444.4
  Solder Side w12: R720.1 3925.26,4325 3977.31,4272.94 3977.31,4272.69 4050,4200 J10000.1
MAXON2_PWM: U650.12 U651.8 | length 162.5
  Solder Side w12: U650.12 3111.5,3606.22 U651.8
MAXON2_PWM_INV: U650.13 U722.5 | length 733.2
  Solder Side w12: U650.13 3050,3643.52 3068.24,3661.76 3131.35,3661.76 3156.09,3686.5 3195,3686.5 3253.5,3745 3470,3745 3500,3775 U722.5
MAXON2_PWM_LOG: J10000.3 R722.1 | length 985.9
  Solder Side w12: R722.1 3525.26,4325 3600,4250.26 3600,4150 3641.5,4108.5 4191.5,4108.5 J10000.3
MAXON2_V_CMD: U651.3 XM700.26 | length 273.8
  Solder Side w12: XM700.26 3105.41,3200 3160.46,3255.06 3160.46,3292.43 U651.3
NetC0x_1: C0x.1 D1x.2 U0x.16 | length 417.7
  Component Side w24: U0x.16 2960.51,2650 3075,2650 3103.15,2678.15 C0x.1 3103.15,2823.27 D1x.2
NetC3x_1: C3x.1 D7x.2 U2x.16 | length 577
  Component Side w24: U2x.16 3710.51,2650 3825,2650 3853.15,2678.15 C3x.1 ; C3x.1 D7x.2@3853.15,2823.27 ; C3x.1 D7x.2@3853.15,2823.27 ; D7x.2@3853.15,2823.27 D7x.2 D7x.2@3853.15,2823.27
NetD2x_1: D2x.1 Q1x.1 R1x.2 | length 672.5
  Component Side w24: R1x.2 2896.85,2439.57 D2x.1 2895,2388.58 2895,1955.2 Q1x.1
NetD2x_2: D2x.2 R1x.1 U0x.15 | length 386.7
  Component Side w24: U0x.15 2870,2655 2900,2625 2928.15,2625 R1x.1 3003.15,2510.43 D2x.2
NetD3x_1: D3x.1 Q2x.1 R2x.2 | length 672.5
  Component Side w24: R2x.2 2546.85,2439.57 D3x.1 2545,2388.58 2545,1955.2 Q2x.1
NetD3x_2: D3x.2 R2x.1 U0x.10 | length 328.8
  Component Side w24: U0x.10 2620,2583.15 R2x.1 2653.15,2510.43 D3x.2
NetD8x_1: D8x.1 Q5x.1 R5x.2 | length 672.5
  Component Side w24: R5x.2 3646.85,2439.57 D8x.1 3645,2388.58 3645,1955.2 Q5x.1
NetD8x_2: D8x.2 R5x.1 U2x.15 | length 386.7
  Component Side w24: U2x.15 3620,2655 3650,2625 3678.15,2625 R5x.1 3753.15,2510.43 D8x.2
NetD9x_1: D9x.1 Q6x.1 R6x.2 | length 672.5
  Component Side w24: R6x.2 3296.85,2439.57 D9x.1 3295,2388.58 3295,1955.2 Q6x.1
NetD9x_2: D9x.2 R6x.1 U2x.10 | length 328.8
  Component Side w24: U2x.10 3370,2583.15 R6x.1 3403.15,2510.43 D9x.2
NetR620_2: R620.2 U620.1 | length 106.1
  Solder Side w12: R620.2 2350,4317.52 U620.1
NetR621_2: R621.2 U621.1 | length 106.1
  Solder Side w12: R621.2 2550,4317.52 U621.1
NetR622_2: R622.2 U622.1 | length 106.1
  Solder Side w12: R622.2 2750,4317.52 U622.1
NetR720_2: R720.2 U720.1 | length 106.1
  Solder Side w12: R720.2 3850,4317.52 U720.1
NetR721_2: R721.2 U721.1 | length 106.1
  Solder Side w12: R721.2 3650,4317.52 U721.1
NetR722_2: R722.2 U722.1 | length 106.1
  Solder Side w12: R722.2 3450,4317.52 U722.1
U1: B1x.1 C0x.2 D10x.1 D12x.2 Q1x.3 Q2x.4 U0x.14 | length 1989.2
  Component Side w24: Q2x.4 2820,2329.84 U0x.14 2820,2730 2850,2760 2961.85,2760 C0x.2
  Component Side w40: Q2x.4 v2(2675,2000) 2675,1811 B1x.1 v2(2911,1825) 3024.8,1825 Q1x.3
  Solder Side w40: v2(2675,2000) D12x.2 ; v2(2911,1825) 3011.81,1825 D10x.1
U1_H: J16000x.4 U0x.1 | length 128.8
  Component Side w12: J16000x.4 2920,2980 U0x.1
U1_L: J16000x.3 U0x.2 | length 149.5
  Component Side w12: J16000x.3 2870,2930 U0x.2
VCC_DYNA: J4000.2 J4010.2 J4020.2 J4030.2 | length 675
  Solder Side w40: J4030.2 J4020.2 J4010.2 J4000.2
pads on no net: J601.0 J601.2 J602.0 J602.2 J701.0 J701.2 J702.0 J702.2 U0x.6 U0x.7 U0x.12 U0x.13 U2x.6 U2x.7 U2x.12 U2x.13 XM600.12 XM600.18 XM600.19 XM600.25 XM700.12 XM700.18 XM700.19 XM700.25
copper on no net:
  other v3: 2100,2600 4000,3750 2100,4900

## Polygon pours and split planes (outlines as drawn)
GND_PWR on Component Side "GND_PWR_4" (solid, remove dead copper, pour order 10): 2550,1625 2550,3100 4225,3100 4200,3100 4100,3100 4100,4375 4375,4375 4375,4750 3775,4750 3775,5250 3225,5250 3225,4750 2675,4750 2675,5250 2125,5250 2125,4750 2025,4750 2025,1625 2550,1625
GND_PWR on Solder Side "GND_PWR_1" (solid, remove dead copper, pour order 0): 2225,1625 3900,1625 3900,2075 3875,2050 2550,2050 2550,2150 2225,2150 2225,1625
GND_PWR on Solder Side "GND_PWR_2" (solid, remove dead copper, pour order 2): 2225,2250 3900,2250 3900,3125 2225,3125 2225,2375
24V on Solder Side "24V_1" (solid, remove dead copper, pour order 4): 2025,1625 2225,1625 2225,4375 4375,4375 4375,4750 2025,4750 2025,1625
GND_PWR on Solder Side "GND_PWR_3" (solid, remove dead copper, pour order 6): 2225,4375 2225,3150 4100,3150 4100,4375 2225,4375

## Other copper
Solder Side:
  pour cut-out: 3000,3832.28 3000,3617.72 3300,3617.72 3300,3832.28
  pour cut-out: 3085.91,3460 3085.91,3294.65 3213.86,3294.65 3213.86,3460

## Text inside footprints (layer, text, board x,y; h text height)
C1: Top Overlay "+" at 2050,2320 h59.06 r180
DC650: Top Overlay "Vi" at 2183.07,2876.38 h60 r90; Top Overlay "Vo" at 2379.92,2876.38 h60 r90
J601: Top Overlay "1" at 3650,5220 h39.37 r180; Top Overlay "6" at 3292.83,5130.31 h39.37 r180
J602: Top Overlay "6" at 3841.57,4896.46 h39.37 r180; Top Overlay "1" at 4120,5120 h39.37 r180
J701: Top Overlay "1" at 2550,5220 h39.37 r180; Top Overlay "6" at 2192.83,5130.31 h39.37 r180
J702: Top Overlay "6" at 2741.57,4896.46 h39.37 r180; Top Overlay "1" at 3020,5120 h39.37 r180